# EAGLE board TEST_POINTS (EAGLE 4.09)

Size 160 x 100 mm. Coordinates in mm from the lower left corner, seen from the top.
Outline: 0,0 160,0 160,100 0,100 0,0
Copper layers used: 

## Footprints (pad centres in the part's own frame; a part is rotated, then mirrored left to right if it is on the bottom)
B1,27 = smd 1.27 x 1.27: PP 0,0
B2,54 = smd 2.54 x 2.54: PP 0,0
TP06R = smd 0.6 x 0.6: TP 0,0
TP06SQ = smd 0.6 x 0.6: TP 0,0
TP07R = smd 0.7 x 0.7: TP 0,0
TP07SQ = smd 0.7 x 0.7: TP 0,0
TP08R = smd 0.8 x 0.8: TP 0,0
TP08SQ = smd 0.8 x 0.8: TP 0,0
TP09R = smd 0.9 x 0.9: TP 0,0
TP09SQ = smd 0.9 x 0.9: TP 0,0
TP10R = smd 1 x 1: TP 0,0
TP10SQ = smd 1 x 1: TP 0,0
TP11R = smd 1.1 x 1.1: TP 0,0
TP11SQ = smd 1.1 x 1.1: TP 0,0
TP12R = smd 1.2 x 1.2: TP 0,0
TP12SQ = smd 1.2 x 1.2: TP 0,0
TP13R = smd 1.3 x 1.3: TP 0,0
TP13SQ = smd 1.3 x 1.3: TP 0,0
TP14R = smd 1.4 x 1.4: TP 0,0
TP14SQ = smd 1.4 x 1.4: TP 0,0
TP15R = smd 1.5 x 1.5: TP 0,0
TP15SQ = smd 1.5 x 1.5: TP 0,0
TP16R = smd 1.6 x 1.6: TP 0,0
TP16SQ = smd 1.6 x 1.6: TP 0,0
TP17R = smd 1.7 x 1.7: TP 0,0
TP17SQ = smd 1.7 x 1.7: TP 0,0
TP18R = smd 1.8 x 1.8: TP 0,0
TP18SQ = smd 1.8 x 1.8: TP 0,0
TP19R = smd 1.9 x 1.9: TP 0,0
TP19SQ = smd 1.9 x 1.9: TP 0,0
TP20R = smd 2 x 2: TP 0,0
TP20SQ = smd 2 x 2: TP 0,0

## Placement (x,y rotation side)
E$1  B1,27  [B1,27]  6.98,93.18 0 top
E$2  B2,54  [B2,54]  14.6,93.18 0 top
E$3  TP06R  [TP06R]  22.22,93.18 0 top
E$4  TP06SQ  [TP06SQ]  29.84,93.18 0 top
E$5  TP07R  [TP07R]  37.46,93.18 0 top
E$6  TP07SQ  [TP07SQ]  43.81,93.18 0 top
E$7  TP08R  [TP08R]  51.43,93.18 0 top
E$8  TP08SQ  [TP08SQ]  57.78,93.18 0 top
E$9  TP09R  [TP09R]  64.13,93.18 0 top
E$10  TP09SQ  [TP09SQ]  70.48,93.18 0 top
E$11  TP10R  [TP10R]  78.1,93.18 0 top
E$12  TP10SQ  [TP10SQ]  85.72,93.18 0 top
E$13  TP11R  [TP11R]  92.07,93.18 0 top
E$14  TP11SQ  [TP11SQ]  99.69,93.18 0 top
E$15  TP12R  [TP12R]  6.98,80.48 0 top
E$16  TP12SQ  [TP12SQ]  14.6,80.48 0 top
E$17  TP13R  [TP13R]  22.22,80.48 0 top
E$18  TP13SQ  [TP13SQ]  29.84,80.48 0 top
E$19  TP14R  [TP14R]  37.46,80.48 0 top
E$20  TP14SQ  [TP14SQ]  43.81,80.48 0 top
E$21  TP15R  [TP15R]  51.43,80.48 0 top
E$22  TP15SQ  [TP15SQ]  57.78,80.48 0 top
E$23  TP16R  [TP16R]  64.13,80.48 0 top
E$24  TP16SQ  [TP16SQ]  70.48,80.48 0 top
E$25  TP17R  [TP17R]  78.1,80.48 0 top
E$26  TP17SQ  [TP17SQ]  85.72,80.48 0 top
E$27  TP18R  [TP18R]  92.07,80.48 0 top
E$28  TP18SQ  [TP18SQ]  99.69,80.48 0 top
E$29  TP19R  [TP19R]  108.58,80.48 0 top
E$30  TP19SQ  [TP19SQ]  116.2,80.48 0 top
E$31  TP20R  [TP20R]  125.09,80.48 0 top
E$32  TP20SQ  [TP20SQ]  135.25,80.48 0 top

## Library data of the parts
E$1-E$32 = testpad